# Altium PCB Telemetria_Oficial.PcbDoc
Units mm, origin at the board's own origin, x right, y up, seen from the top; angles counter-clockwise.
Board outline 65.15 x 100.08 mm, 2 copper layers (Top Layer, Bottom Layer); 27 components, 23 nets, 104 pads, 14 vias.
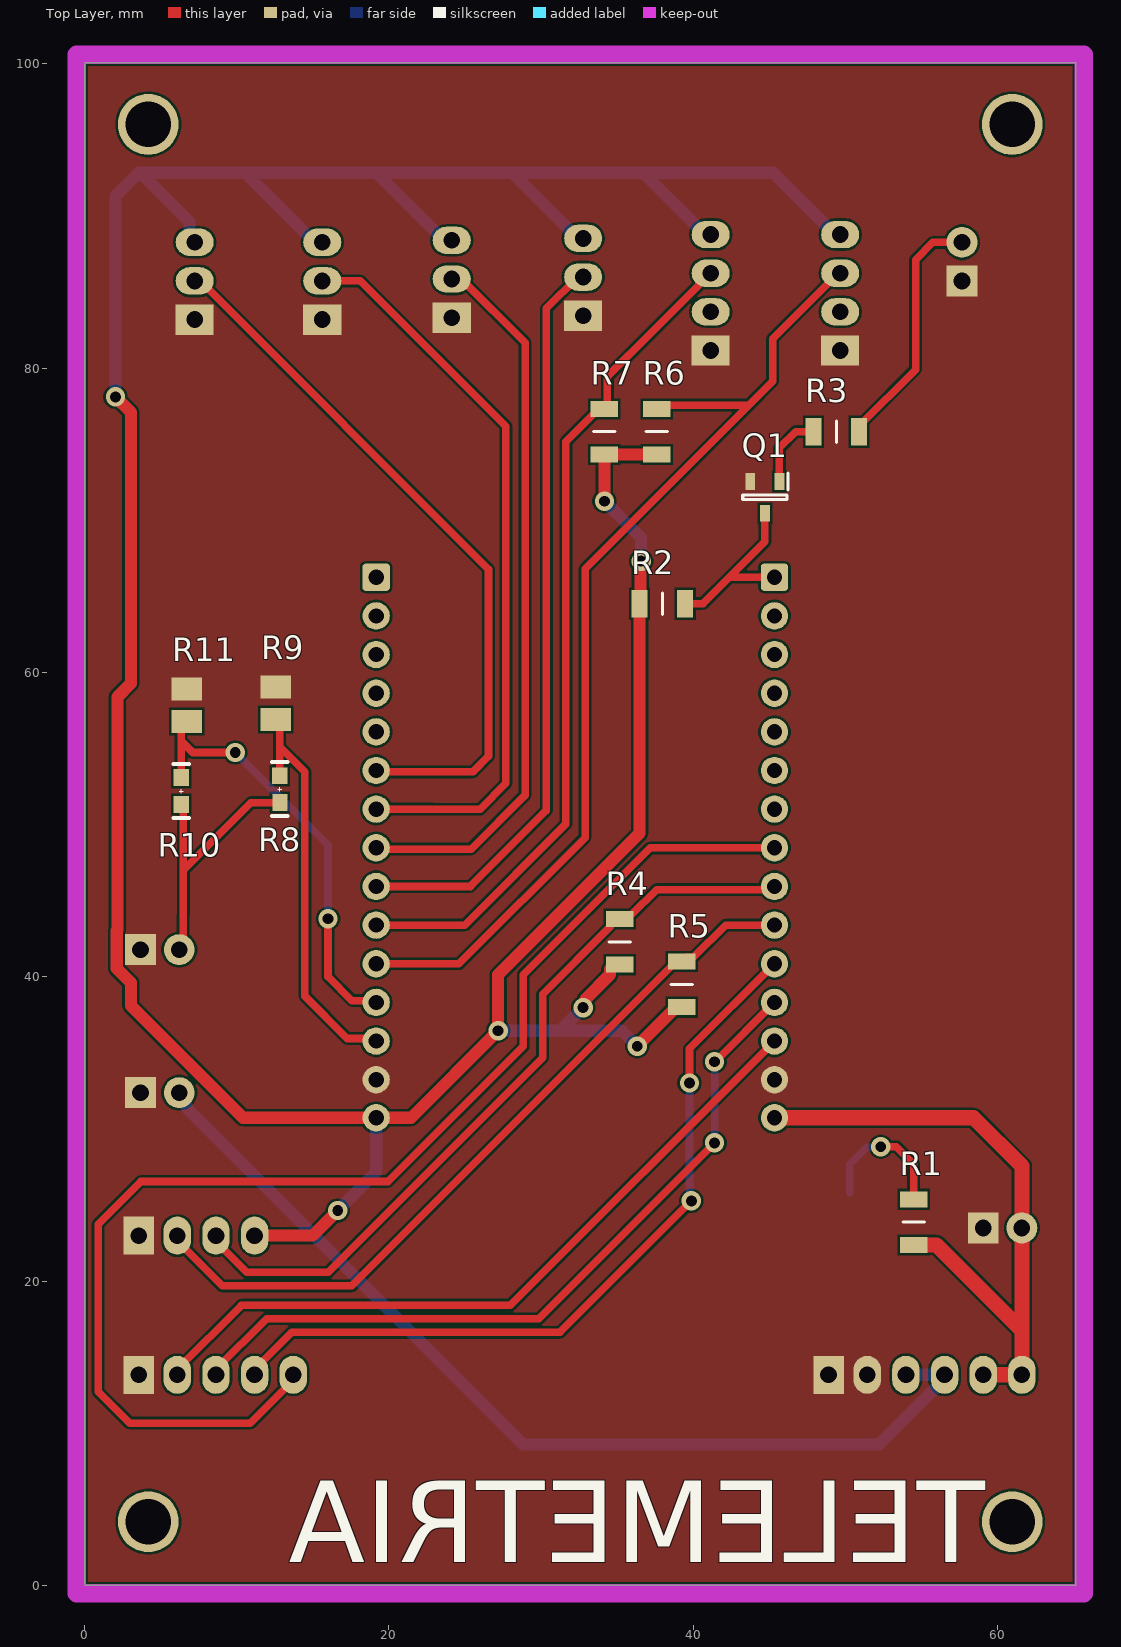
[diagram p0: Top Layer view]
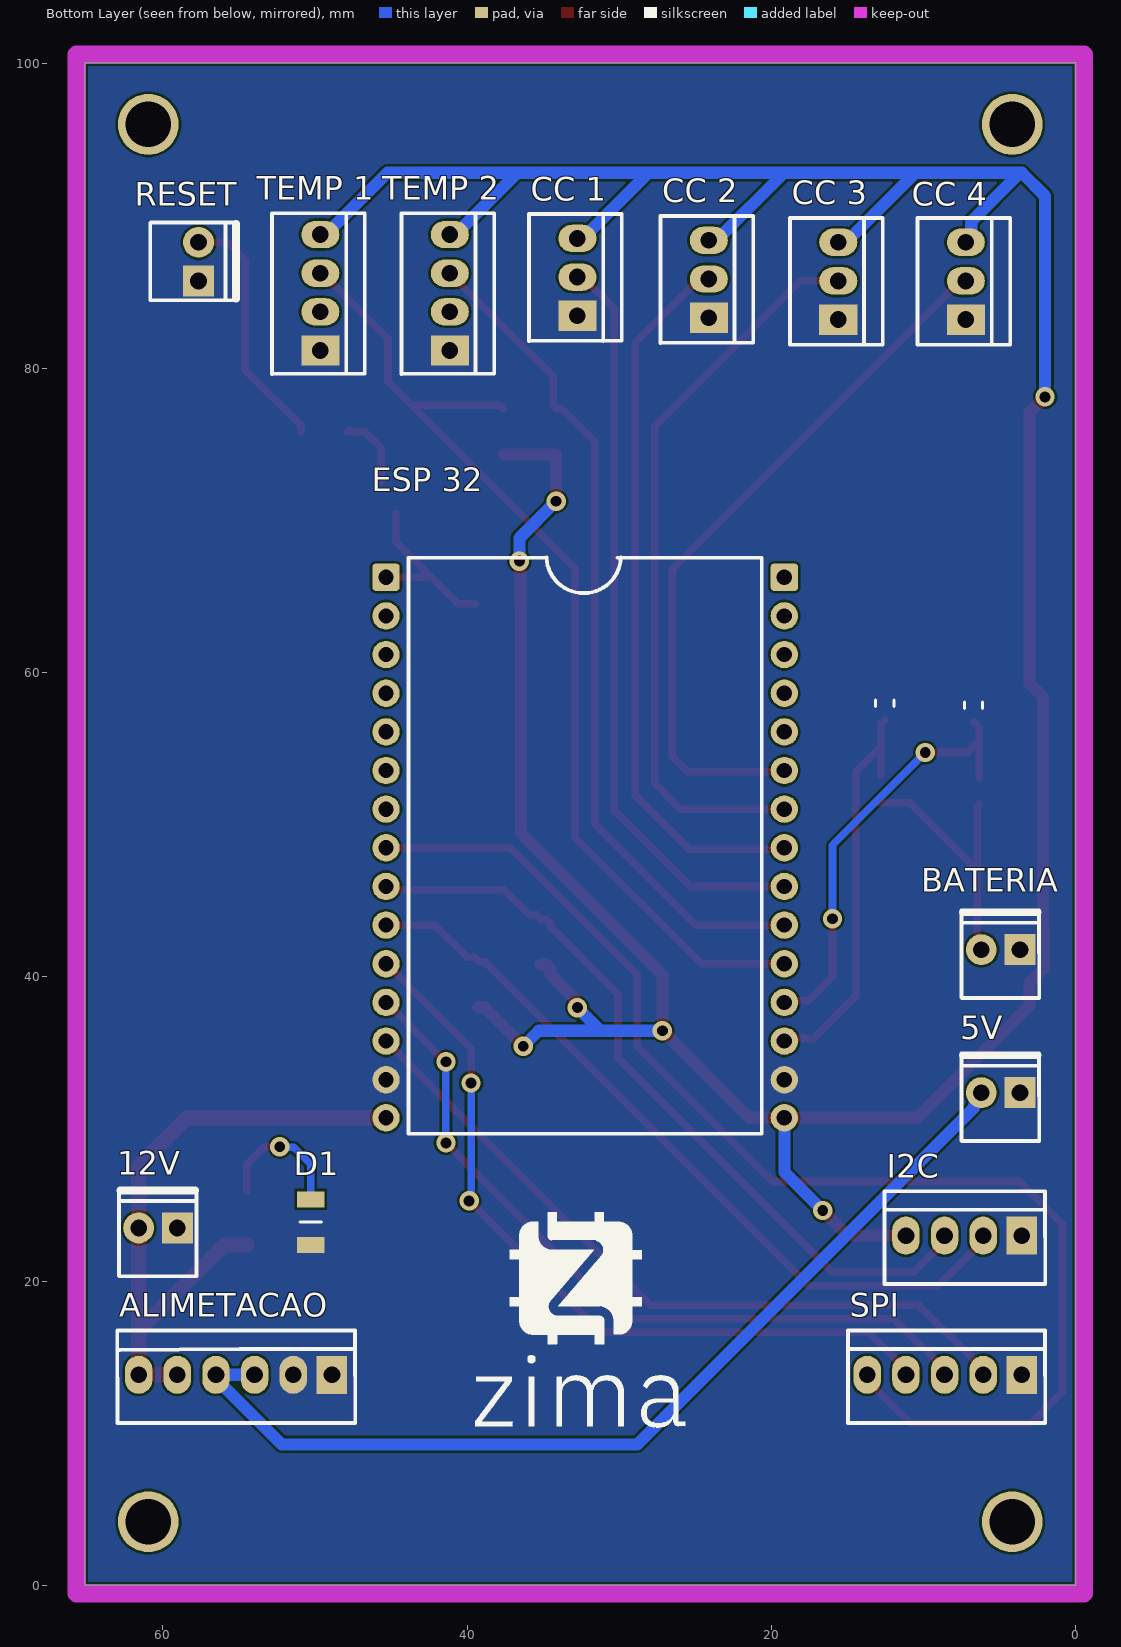
[diagram p1: Bottom Layer view, seen from below]

## Layer stack, top to bottom
Top Solder: solder mask 0.0102, Solder Resist, Dk 3.5
Top Layer: signal copper 0.0356
Dielectric 1: dielectric 0.32, FR-4, Dk 4.8
Bottom Layer: signal copper 0.0356
Bottom Solder: solder mask 0.0102, Solder Resist, Dk 3.5

## Board outline
0,0 65.151,0 65.151,100.076 0,100.076

## Design rules (kind name [scope] priority, off if disabled: settings)
Clearance [All] p1: gap=0.152 ignorepadtopadclearanceinfootprint=FALSE except(0: Arc-Hole Track-Hole SMDPad-Hole THPad-Hole Via-Hole Fill-Hole Poly-Hole Region-Hole Text-Hole)
ComponentClearance [All] p1: gap=0.1 collisioncheckmode=3 verticalgap=0.1 showdistances=FALSE
HoleSize [All] p1: absolutevalues=TRUE maxlimit=3 minlimit=0.025 maxpercent=80.000 minpercent=20.000
MinimumSolderMaskSliver [All] p1: minsoldermaskwidth=0.1
PolygonConnect [All] p1: connectstyle=Direct reliefconductorwidth=0.254 reliefentries=4 polygonreliefangle="90 Angle" airgapwidth=0.254
RoutingVias [All] p1: holewidth=0.4 width=0.8 viastyle="Through Hole" minholewidth=0.3 minwidth=0.6 maxholewidth=0.5 maxwidth=1
SilkToSilkClearance [All] p1: silktosilkclearance=0
SilkToSolderMaskClearance [IsPad] p1: minsilkscreentomaskgap=0 clearancetoexposedcopper=TRUE
SolderMaskExpansion [All] p1: expansion=0.08 istentingtop=FALSE
Width [All] p1: maxlimit=1 minlimit=0.3 preferedwidth=0.5
25 further rules are at their usual default settings.

## Classes and differential pairs
component class U_Telemetria_Sensores: "CC 1" "CC 2" "CC 3" "CC 4" R6 R7 R8 R9 R10 R11 "TEMP 1" "TEMP 2"
component class U_Telemetria_Comunicação: I2C R4 R5 SPI
component class U_Telemetria_Alimentação_&_Reset: 5V 12V ALIMETACAO BATERIA D1 Q1 R1 R2 R3 RESET
component class Telemetria_Oficial: "ESP 32"

## Components (designator, comment, footprint, x,y, rotation, side; value= is the part's Value field where it differs from the comment)
5V "KK_2.54_2vias" KK_2VIAS_180º 3.683,32.385 r0 bottom
12V "KK_2.54_2vias" KK_2VIAS_180º 59.055,23.495 r0 bottom
ALIMETACAO "KK_2.54_6vias" KK_6vias_180° 48.895,13.843 r0 bottom
BATERIA "KK_2.54_2vias" KK_2VIAS_180º 3.683,41.783 r0 bottom
"CC 1" "KK_2.54_3vias" KK_3vias_180º 32.766,83.439 r90 bottom
"CC 2" "KK_2.54_3vias" KK_3vias_180º 24.13,83.312 r90 bottom
"CC 3" "KK_2.54_3vias" KK_3vias_180º 15.621,83.185 r90 bottom
"CC 4" "KK_2.54_3vias" KK_3vias_180º 7.239,83.185 r90 bottom
D1 "LED 3MM RED" "LED RED" 50.292,23.876 r270 bottom
"ESP 32" "microcontrolador" ESP32_Desvikit_v1 45.339,66.254 r180 bottom value="ESP32 Desvikit V1"
I2C "KK_2.54_4vias" KK_4vias_180° 3.556,22.987 r0 bottom
Q1 "Trans BC817" SOT96P240X110-3N 44.704,71.501 r270 top
R1 "680R" RESC3216X60N 54.483,23.876 r90 top
R2 "2k2" RESC3216X60N 37.973,64.516 r180 top
R3 "2k2" RESC3216X60N 49.403,75.819 r0 top
R4 "4k7" RESC3216X60N 35.179,42.291 r270 top
R5 "4k7" RESC3216X60N 39.243,39.497 r270 top
R6 "10k" RESC3216X60N 37.592,75.819 r90 top
R7 "10k" RESC3216X60N 34.163,75.819 r90 top
R8 "1M6" "RESISTOR 0603" 12.827,52.324 r90 top
R9 "140K" "RESISTOR 0805" 12.573,57.971 r90 top
R10 "1M6" "RESISTOR 0603" 6.35,52.197 r90 top
R11 "140K" "RESISTOR 0805" 6.731,57.844 r90 top
RESET "KK_2.54_2vias" KK_2VIAS_180º 57.658,85.725 r90 bottom
SPI "KK_2.54_5vias" KK_5vias_180° 3.556,13.843 r0 bottom
"TEMP 1" "KK_2.54_4vias" KK_4vias_180° 49.657,81.153 r90 bottom
"TEMP 2" "KK_2.54_4vias" KK_4vias_180° 41.148,81.153 r90 bottom

## Footprints (in the part's own frame and the unit in brackets; to place one, negate y for a bottom-side part, rotate by r counter-clockwise, add the part's x,y. Pads: shape width x height; smd on the part's side, far side on the other; paste and mask are expansions set on the pad)
ESP32_Desvikit_v1 [mm]
  rrect25% 1.8x1.8 hole 1: 1(0,0) 30(26.175,0)
  round 1.8 hole 1: 2(0,-2.54) 3(0,-5.08) 4(0,-7.62) 5(0,-10.16) 6(0,-12.7) 7(0,-15.24) 8(0,-17.78) 9(0,-20.32) 10(0,-22.86) 11(0,-25.4) 12(0,-27.94) 13(0,-30.48) 14(0,-33.02) 15(0,-35.52) 16(26.175,-35.52) 17(26.175,-33.02) 18(26.175,-30.48) 19(26.175,-27.94) 20(26.175,-25.4) 21(26.175,-22.86) 22(26.175,-20.32) 23(26.175,-17.78) 24(26.175,-15.24) 25(26.175,-12.7) 26(26.175,-10.16) 27(26.175,-7.62) 28(26.175,-5.08) 29(26.175,-2.54)
  silkscreen extent 1.47,-36.57 24.69,1.31, body extent -1.2,-46.03 27.4,4.9, height 15.1
KK_2VIAS_180º [mil] "Header KK 2pin"
  rect 80x80 hole 43.31: 1(0,0)
  round 80 hole 43.31: 2(100,0)
  silkscreen extent -50,-101 151,125, body extent -61,-108 165,128, height 465
KK_3vias_180º [mm] "Header KK 3 pin"
  rect 2x2.5 hole 1.1: 1(0,0)
  oval 1.8x2.5 hole 1.1: 2(2.54,0) 3(5.08,0)
  silkscreen extent -1.65,-2.92 6.69,3.17, body extent -1.6,-2.95 6.69,3.05, height 11.91
KK_4vias_180° [mm] "Header KK 4 pin"
  rect 2x2.5 hole 1.1: 1(0,0)
  oval 1.8x2.5 hole 1.1: 2(2.54,0) 3(5.08,0) 4(7.62,0)
  silkscreen extent -1.53,-2.92 9.02,3.17, body extent -1.4,-2.79 8.76,3.01, height 11.82
KK_5vias_180° [mm] "Header KK 5 pin"
  rect 2x2.5 hole 1.1: 1(0,0)
  oval 1.8x2.5 hole 1.1: 2(2.54,0) 3(5.08,0) 4(7.62,0) 5(10.16,0)
  silkscreen extent -1.53,-2.92 11.43,3.17, body extent -1.4,-2.79 11.3,3.01, height 11.82
KK_6vias_180° [mm]
  rect 2x2.5 hole 1.1: 1(0,0)
  oval 1.8x2.5 hole 1.1: 2(2.54,0) 3(5.08,0) 4(7.62,0) 5(10.16,0) 6(12.7,0)
  silkscreen extent -1.53,-2.92 14.11,3.17, body extent -1.4,-2.79 13.84,3.05, height 11.8
"LED RED" [mm]
  rect 1.05x1.8 smd: 1(-1.5,0) 2(1.5,0)
  silkscreen extent 0,-0.7 0,0.7, body extent -0.79,-0.43 0.81,0.37, height 0.75
RESC3216X60N [mm]
  rect 1.05x1.8 smd: 1(-1.5,0) 2(1.5,0)
  silkscreen extent 0,-0.7 0,0.7, body extent -1.57,-0.8 1.58,0.8, height 0.6
"RESISTOR 0603" [mm] "RES 5% 0603"
  rect 1.1x1 smd: 1(-0.877,-0.011) 2(0.889,0)
  silkscreen extent -1.77,-0.52 1.79,0.5, body extent -0.8,-0.4 0.8,0.4, height 0.3
"RESISTOR 0805" [mm] "Chip Resistor, 2-Leads, Body 2,00x1,25mm, IPC Low Density"
  rect 1.5x2 smd: 1(-1.075,0) 2(1.075,0)
  body extent -1,-0.63 1,0.62
SOT96P240X110-3N [mm]
  rect 1.1x0.65 smd: 1(-1.05,0.96) 2(-1.05,-0.96) 3(1.05,0)
  silkscreen extent -1.6,-1.45 0.15,1.54, body extent -1.2,-1.45 1.2,1.45, height 1.1

## Part data
5V 12V BATERIA RESET: "Conector KK 2.54mm 2 vias", Descrição="Conector KK 3 vias com passo 2.54mm", Encapsulamento="PTH - 180º", Modelo="2 vias - 180º", Valor="KK 2 vias 180º"
ALIMETACAO: "Conector KK 2.54mm 6 vias", Descrição="Conector KK 3 vias com passo 2.54mm", Encapsulamento="PTH - 180º", Modelo="3 vias - 180º", Valor="KK 6 vias 180º"
"CC 1" "CC 2" "CC 3" "CC 4": "Conector KK 2.54mm 3 vias", Descrição="Conector KK 3 vias com passo 2.54mm", Encapsulamento="PTH - 180º", Modelo="3 vias - 180º", Valor="KK 3 vias 180º"
D1: Current If Luminous Intensity=2, Forward Current If=20, Forward Voltage VF Max=2.5, LED Colour=Red, Manufacturer=Paralight, Manufacturer Part Number=IMP585, Operating Temperature Max=85, Operating Temperature Min=-40, Operating Temperature Range="-40°C to +85", Peak Forward Current=7, Supplier Part Number 1="Led 3mm Vermelho Difuso L-314HD - Paralight", Voltage Vf Typ="2.2V<!--FANDB--><div class=\"features-and-benefits-container\"><div class=\"features-and-benefits-description\"><span class=\"features-benefits-value\">The L-934LID from Kingbright is a through hole round shape high efficiency red colour LED. The device is made of gallium arsenide phosphide on gallium phosphide orange light emitting diode. This LED is widely used because of low power consumption, long life and solid state reliability.</span></div><div class=\"features-and-benefits-list\"><ul class=\"features-and-benefits-list-list\"><li class=\"features-and-benefits-list-item\">Standard bulb size of T-1 (3mm)</li><li class=\"features-and-benefits-list-item\">Reliable and rugged</li><li class=\"features-and-benefits-list-item\">Viewing angle is 60°</li><li class=\"features-and-benefits-list-item\">Luminous intensity of 3mcd at 2mA</li><li class=\"features-and-benefits-list-item\">Forward voltage is 2.0V</li><li class=\"features-and-benefits-list-item\">Forward current (If) is 20mA</li><li class=\"features-and-benefits-list-item\">Dominant wavelength is 625nm at IF=20mA</li><li class=\"features-and-benefits-list-item\">Peak wavelength is 627nm at IF=20", Bulb Size=3mm, ComponentLink1Description=http://loja.multcomercial.com.br/led-3mm-vermelho-difuso-l-314hd-paralight.html, ComponentLink1URL=http://loja.multcomercial.com.br/led-3mm-vermelho-difuso-l-314hd-paralight.html, Dominant Wavelength=625, External Diameter=2.9, External Length / Height=4.6, Forward Current If Max=20, Forward Voltage=2, Lead Cross-section Depth=0.5, Lead Cross-section Width=0.5, Lead Spacing=2.54, LED / Lamp Size="3mm / T-1", LED Mounting="Through Hole", LED Type=Standard, Lens Shape=Round, Luminous Intensity=3, Luminous Intensity @ If Min=0.7, Luminous Intensity Typ=3, Mounting Type="PCB Through Hole", MSL=-, No. of Pins=2, Packaging=Each, Peak Wavelength=625, PIV Max=5, Pricing 1="1=0.15 (BRL)", RoHS=YES, Stock 1=35260, Supplier 1="Mult Comercial", SVHC="No SVHC (15-Jun-2015)", Viewing Angle=60°, Wavelength Typ=625
"ESP 32": library part "ESP32 Desvikit v1", "microcontrolador com moculo bluethoth e wifi"
I2C "TEMP 1" "TEMP 2": "Conector KK 2.54mm 4 vias", Descrição="Conector KK 3 vias com passo 2.54mm", Encapsulamento="PTH - 180º", Modelo="3 vias - 180º", Valor="KK 4 vias 180º"
Q1: "Transistor BJT NPN BC817-25-7-F", Arrow Part Number=BC817-25-7-F, Manufacturer_Name="Diodes Inc.", Mouser Part Number=621-BC817-25-7-F, Arrow Price/Stock=https://www.arrow.com/en/products/bc817-25-7-f/diodes-incorporated, Datasheet Link=https://www.diodes.com/assets/Datasheets/ds11107.pdf, Height=1.1mm, Manufacturer_Part_Number=BC817-25-7-F, Mouser Price/Stock=https://www.mouser.co.uk/ProductDetail/Diodes-Incorporated/BC817-25-7-F?qs=rGAXPo9uwV0jK0EyLZnqOw%3D%3D
R1 R2 R3 R4 R5 R6 R7: library part "Resistor 1206", "Resistor", Arrow Part Number=CRCW12064K70FKEA, Manufacturer_Name=Vishay, Mouser Part Number=71-CRCW1206-4.7K-E3, Arrow Price/Stock=https://www.arrow.com/en/products/crcw12064k70fkea/vishay, Datasheet Link=http://docs-emea.rs-online.com/webdocs/13ec/0900766b813ecc08.pdf, Height=0.6mm, Manufacturer_Part_Number=CRCW12064K70FKEA, Mouser Price/Stock=https://www.mouser.co.uk/ProductDetail/Vishay-Dale/CRCW12064K70FKEA?qs=1vm4qhDHCvlKJmatsKzyFQ%3D%3D
R8 R10: library part "RES 0603 5%", "0603", Case Code - mm=1608, Manufacturer="PANASONIC ELECTRONIC COMPONENTS", Manufacturer Part Number=ERJ-3GEY0R00V, Operating Temperature="-55°C ~ 155°C", Operating Temperature Range="- 55 C to + 155 C", Package / Case="0603 (1608 Metric)", Power (Watts)="0.1W, 1/10W", Power Rating=100, Resistance=0, Resistance (Ohms)=0.0, Resistance Tolerance=-, Resistor Case Style="0603 [1608 Metric]", Supplier Part Number 1=667-ERJ-3GEY0R00V, Tolerance=Jumper, Voltage Rating=75, Brand=Panasonic, Case Code - in=0603, Category=Resistors, ComponentLink1Description=http://www.farnell.com/cad/1697908.zip, ComponentLink1URL=http://www.farnell.com/cad/1697908.zip, ComponentLink2Description=http://www.farnell.com/datasheets/1678796.pdf, ComponentLink2URL=http://www.farnell.com/datasheets/1678796.pdf, ComponentLink3Description=http://industrial.panasonic.com/www-cgi/jvcr13pz.cgi?E+PZ+3+AOA0001+ERJ3GEY0R00V+7+WW, ComponentLink3URL=http://industrial.panasonic.com/www-cgi/jvcr13pz.cgi?E+PZ+3+AOA0001+ERJ3GEY0R00V+7+WW, ComponentLink4Description=http://www.mouser.com/ds/2/315/AOA0000C84-947596.pdf, ComponentLink4URL=http://www.mouser.com/ds/2/315/AOA0000C84-947596.pdf, Composition="Thick Film", Features="Automotive AEC-Q200", Height="0.022\" (0.55mm)", Length="1.6 mm", Minimum Order Quantity=1, MSL=-, Number of Terminations=2, Packaging="Cut Tape", Pricing 1="1=0.160, 10=0.019, 100=0.013, 500=0.010, 1000=0.005, 5000=0.003 (AUD)", Product="Thick Film Resistors Zero-Ohm", Product Range="AEC-Q200 ERJ3", Qualification=AEC-Q200, Reeling=True, RoHS=YES, RoHS - Mouser=E, Series=ERJ, Size / Dimension="0.063\" L x 0.031\" W (1.60mm x 0.80mm)", Stock 1=1987085, Supplier 1=Mouser, Supplier Device Package=0603, Temperature Coefficient=-, Termination Style=SMD/SMT, Type="Thick Film Resistors SMD", Width="0.8 mm"
R9 R11: library part "RES 0805 5%", "0805", Case Code - in=0603, Case Code - mm=1608, Manufacturer="PANASONIC ELECTRONIC COMPONENTS", Manufacturer Part Number=ERJ-3GEY0R00V, Operating Temperature="-55°C ~ 155°C", Operating Temperature Range="- 55 C to + 155 C", Package / Case="0603 (1608 Metric)", Power (Watts)="0.1W, 1/10W", Power Rating=100, Resistance=0, Resistance (Ohms)=0.0, Resistance Tolerance=-, Resistor Case Style="0603 [1608 Metric]", Supplier Part Number 1=667-ERJ-3GEY0R00V, Tolerance=Jumper, Voltage Rating=75, Brand=Panasonic, Category=Resistors, ComponentLink1Description=http://www.farnell.com/cad/1697908.zip, ComponentLink1URL=http://www.farnell.com/cad/1697908.zip, ComponentLink2Description=http://www.farnell.com/datasheets/1678796.pdf, ComponentLink2URL=http://www.farnell.com/datasheets/1678796.pdf, ComponentLink3Description=http://industrial.panasonic.com/www-cgi/jvcr13pz.cgi?E+PZ+3+AOA0001+ERJ3GEY0R00V+7+WW, ComponentLink3URL=http://industrial.panasonic.com/www-cgi/jvcr13pz.cgi?E+PZ+3+AOA0001+ERJ3GEY0R00V+7+WW, ComponentLink4Description=http://www.mouser.com/ds/2/315/AOA0000C84-947596.pdf, ComponentLink4URL=http://www.mouser.com/ds/2/315/AOA0000C84-947596.pdf, Composition="Thick Film", Features="Automotive AEC-Q200", Height="0.022\" (0.55mm)", Length="1.6 mm", Minimum Order Quantity=1, MSL=-, Number of Terminations=2, Packaging="Cut Tape", Pricing 1="1=0.160, 10=0.019, 100=0.013, 500=0.010, 1000=0.005, 5000=0.003 (AUD)", Product="Thick Film Resistors Zero-Ohm", Product Range="AEC-Q200 ERJ3", Qualification=AEC-Q200, Reeling=True, RoHS=YES, RoHS - Mouser=E, Series=ERJ, Size / Dimension="0.063\" L x 0.031\" W (1.60mm x 0.80mm)", Stock 1=1987085, Supplier 1=Mouser, Supplier Device Package=0603, Temperature Coefficient=-, Termination Style=SMD/SMT, Type="Thick Film Resistors SMD", Width="0.8 mm"
SPI: "Conector KK 2.54mm 5 vias", Descrição="Conector KK 3 vias com passo 2.54mm", Encapsulamento="PTH - 180º", Modelo="3 vias - 180º", Valor="KK 5 vias 180º"

## Free pads (board coordinates)
  round 4 hole 3: 1(4.191,96.012) 2(60.96,96.012) 3(4.191,4.191) 4(60.96,4.191)

## Via types
v1: diameter 1.27, hole 0.711, Top Layer to Bottom Layer, 14 vias

## Nets (pads, with @x,y where several pads share a name; then routed paths per layer and width w, separated by ;. In a path a pad name is that pad's centre, name@x,y a point inside that pad or via, vN(x,y) a via of type N, cw(c..) or ccw(c..) an arc to the next point about the centre after c; other vN are vias at no path point)
+3V3: "CC 1.3" "CC 2.3" "CC 3.3" "CC 4.3" "ESP 32.16" "TEMP 1.4" "TEMP 2.4" I2C.4 R2.2 R4.2 R5.2 R6.1 R7.1 | length 245.5
  Top Layer w0.8: v1(2.032,78.105) 3.048,77.089 3.048,59.28 2.159,58.391 2.159,43.072 2.115,43.028 2.115,40.538 3.048,39.605 3.048,38.1 10.414,30.734 19.164,30.734 21.463,30.734 v1(27.178,36.449) 27.178,40.132 36.473,49.427 R2.2 36.524,64.567 36.524,67.258 v1(36.576,67.31) ; I2C.4 14.986,22.987 v1(16.637,24.638) ; v1(32.766,37.973) 32.913,38.12 32.913,38.525 34.529,40.141 34.529,40.516 34.804,40.791 R4.2 ; v1(34.163,71.247) R7.1 R6.1 ; v1(36.322,35.433) 36.322,35.451 38.868,37.997 R5.2
  Bottom Layer w0.8: v1(2.032,78.105) 2.032,91.313 3.556,92.837 10.541,92.837 ; 3.683,92.837 6.887,89.633 6.887,88.617 7.239,88.265 ; 15.621,88.265 15.113,88.265 10.541,92.837 ; v1(16.637,24.638) 19.164,27.165 19.164,30.734 ; 24.13,88.392 23.622,88.392 19.177,92.837 ; v1(27.178,36.449) 31.242,36.449 ; v1(32.766,37.973) 31.242,36.449 ; 32.766,88.519 32.416,88.519 28.098,92.837 ; v1(34.163,71.247) 36.576,68.834 v1(36.576,67.31) ; v1(36.322,35.433) 35.306,36.449 31.242,36.449 ; 41.148,88.773 40.767,88.773 36.703,92.837 ; 49.657,88.773 49.307,88.773 45.243,92.837 36.703,92.837 ; 10.541,92.837 19.177,92.837 ; 19.177,92.837 28.098,92.837 ; 28.098,92.837 36.703,92.837
+5V: 5V.2 ALIMETACAO.3 ALIMETACAO.4 | length 64.7
  Bottom Layer w0.8: 5V.2 6.223,31.97 6.718,31.476 6.718,31.382 28.829,9.271 52.197,9.271 56.515,13.589 ALIMETACAO.4 ALIMETACAO.3
+12V: 12V.2 "ESP 32.15" ALIMETACAO.5 ALIMETACAO.6 R1.1 | length 43.3
  Top Layer w1: 45.339,30.734 58.42,30.734 61.595,27.559 12V.2 61.595,16.764 ; R1.1 55.983,22.376 61.595,16.764 ; ALIMETACAO.5 ALIMETACAO.6 61.595,16.764
CLK_IN: "ESP 32.11" SPI.4 | length 51.6
  Top Layer w0.5: SPI.4 11.176,14.193 13.62,16.637 31.242,16.637 v1(39.878,25.273) ; v1(39.751,33.02) 39.751,35.266 45.339,40.854
  Bottom Layer w0.5: v1(39.751,33.02) 39.751,25.4 v1(39.878,25.273)
Corrente_1: "CC 1.2" "ESP 32.22" | length 49.5
  Top Layer w0.5: 19.164,45.934 25.36,45.934 30.353,50.927 30.353,83.916 32.416,85.979 32.766,85.979
Corrente_2: "CC 2.2" "ESP 32.23" | length 47.6
  Top Layer w0.5: 19.164,48.474 19.251,48.387 25.4,48.387 28.956,51.943 28.956,81.661 24.765,85.852 24.13,85.852
Corrente_3: "CC 3.2" "ESP 32.24" | length 48.7
  Top Layer w0.5: 15.621,85.725 18.13,85.725 27.686,76.169 27.686,52.705 25.988,51.007 22.88,51.007 22.873,51.014 19.164,51.014
Corrente_4: "CC 4.2" "ESP 32.25" | length 47.3
  Top Layer w0.5: 7.239,85.725 7.589,85.725 26.543,66.771 26.543,54.483 25.527,53.467 19.251,53.467 19.164,53.554
EN: "ESP 32.1" Q1.3 R2.1 | length 11.7
  Top Layer w0.5: R2.1 40.64,64.516 42.378,66.254 ; Q1.3 44.704,68.58 42.378,66.254 ; 45.339,66.254 42.378,66.254
GND: 5V.1 12V.1 "CC 1.1" "CC 2.1" "CC 3.1" "CC 4.1" "ESP 32.14" "ESP 32.17" "TEMP 1.1" "TEMP 2.1" ALIMETACAO.1 ALIMETACAO.2 BATERIA.1 D1.2 I2C.1 Q1.2 R9.2 R11.2 RESET.1 SPI.1
MISO_IN: "ESP 32.12" SPI.3 | length 50.2
  Top Layer w0.5: SPI.3 8.636,14.193 11.969,17.526 29.845,17.526 v1(41.402,29.083) ; v1(41.402,34.417) 41.442,34.417 45.339,38.314
  Bottom Layer w0.5: v1(41.402,29.083) v1(41.402,34.417)
MOSI_IN: "ESP 32.13" SPI.2 | length 48.5
  Top Layer w0.5: SPI.2 6.096,14.193 10.318,18.415 27.98,18.415 45.339,35.774
NetD1_1: D1.1 R1.2 | length 8.8
  Top Layer w0.5: v1(52.324,28.829) 53.34,28.829 54.483,27.686 54.483,25.923
  Bottom Layer w0.5: D1.1@50.292,25.805 50.292,27.686 51.4,28.794 52.289,28.794 v1(52.324,28.829)
NetQ1_1: Q1.1 R3.1 | length 5.1
  Top Layer w0.5: Q1.1 45.664,74.747 46.736,75.819 R3.1 R3.1@47.776,75.946
NetR3_2: R3.2 RESET.2 | length 16.4
  Top Layer w0.5: R3.2 50.903,76.194 54.61,79.901 54.61,87.122 55.753,88.265 RESET.2
SCL_IN: "ESP 32.10" I2C.2 R5.1 | length 50.6
  Top Layer w0.5: I2C.2 6.096,22.637 9.048,19.685 17.556,19.685 38.593,40.722 38.868,40.997 R5.1 39.518,41.272 40.002,41.272 42.124,43.394 45.339,43.394
SDA_IN: "ESP 32.9" I2C.3 R4.1 | length 51
  Top Layer w0.5: I2C.3 8.636,22.606 10.668,20.574 16.002,20.574 30.099,34.671 30.099,38.862 34.529,43.292 34.529,43.516 34.804,43.791 R4.1 35.454,44.066 35.938,44.066 37.592,45.72 45.125,45.72 45.339,45.934
SS: "ESP 32.8" SPI.5 | length 83.7
  Top Layer w0.5: SPI.5 13.716,13.493 10.891,10.668 2.96,10.668 0.889,12.739 0.889,23.749 3.683,26.543 19.939,26.543 28.829,35.433 28.829,40.132 37.171,48.474 45.339,48.474
Temperatura_1: "ESP 32.20" "TEMP 1.3" R6.2 | length 67.4
  Top Layer w0.5: 19.164,40.854 24.598,40.854 32.893,49.149 32.893,66.802 43.657,77.566 ; R6.2 37.839,77.566 43.657,77.566 ; 49.657,86.233 49.53,86.233 45.212,81.915 45.212,79.121 43.657,77.566
Temperatura_2: "ESP 32.21" "TEMP 2.3" R7.2 | length 55.6
  Top Layer w0.5: 19.164,43.394 24.979,43.394 31.623,50.038 31.623,75.154 33.788,77.319 R7.2 34.359,77.515 34.359,79.444 37.338,82.423 41.148,86.233
TensãoBat_1: "ESP 32.18" R8.2 R9.1 | length 26.8
  Top Layer w0.5: R9.1 12.827,56.642 12.827,55.118 ; R8.2 12.827,55.118 ; 19.164,35.774 18.997,35.941 17.272,35.941 14.478,38.735 14.478,53.467 12.827,55.118
TensãoBat_2: "ESP 32.19" R10.2 R11.1 | length 28.8
  Top Layer w0.5: R10.2 6.35,55.499 ; R11.1 6.35,56.388 6.35,55.499 ; v1(9.906,54.737) 7.112,54.737 6.35,55.499 ; v1(16.002,43.815) 16.002,40.005 17.571,38.436 19.042,38.436 19.164,38.314
  Bottom Layer w0.5: v1(9.906,54.737) 16.002,48.641 v1(16.002,43.815)
VCC: BATERIA.2 R8.1 R10.1 | length 17.9
  Top Layer w0.5: BATERIA.2 6.477,42.037 6.477,44.069 6.488,44.08 6.488,47.001 ; R10.1 6.488,51.193 6.488,47.001 ; R8.1 10.934,51.447 6.488,47.001
pads on no net: "ESP 32.2" "ESP 32.3" "ESP 32.4" "ESP 32.5" "ESP 32.6" "ESP 32.7" "ESP 32.26" "ESP 32.27" "ESP 32.28" "ESP 32.29" "ESP 32.30" "TEMP 1.2" "TEMP 2.2"

## Polygon pours and split planes (outlines as drawn)
GND on Bottom Layer "GND_L02_P001" (solid, pour order 1): 0,0 65.024,0 65.151,0 65.151,100.076 -0.127,100.076
GND on Top Layer "GND_L01_P000" (solid, pour order 0): -0.127,0 65.151,0 65.151,100.203 65.024,100.076 0,100.076

## Keep-outs
Keep-Out Layer:
  lines w1.2: -0.508,-0.508 -0.508,100.584 65.659,100.584 65.659,-0.508 -0.508,-0.508

## Silkscreen, mask and mechanical layers (free items; w line width, h text height)
Top Overlay:
  text "TELEMETRIA" at 59.182,1.524 h5.36
Bottom Overlay:
  drawing of 7 lines, arcs and shapes, not listed